# EAGLE board slide_sensor (EAGLE 6.4)

Size 102.54 x 80 mm. Coordinates in mm from the lower left corner, seen from the top.
Outline: 0,0 102.54,0 102.54,80 0,80 0,0
Copper layers (1*16): Top 0.035mm / dielectric 1.5mm / Bottom 0.035mm
Design rules "default": minimum track width 10mil, minimum drill 24mil, track to track 8mil, track to pad 8mil, pad to pad 8mil, via to via 8mil, smd to smd 8mil, copper to edge 40mil, drill to drill 8mil, minimum pad ring 10mil, minimum via ring 8mil, stop-mask expansion 4mil, vias tented up to drill 0mil, thermal gap 10mil

## Footprints (pad centres in the part's own frame; a part is rotated, then mirrored left to right if it is on the bottom)
LB10 = drill 0.813 long: 1 -11.43,-3.81; 2 -8.89,-3.81; 3 -6.35,-3.81; 4 -3.81,-3.81; 5 -1.27,-3.81; 6 1.27,-3.81; 7 3.81,-3.81; 8 6.35,-3.81; 9 8.89,-3.81; 10 11.43,-3.81; 11 11.43,3.81; 12 8.89,3.81; 13 6.35,3.81; 14 3.81,3.81; 15 1.27,3.81; 16 -1.27,3.81; 17 -3.81,3.81; 18 -6.35,3.81; 19 -8.89,3.81; 20 -11.43,3.81
DCJ0202 = drill 1 pad 2 long: 1 0,3.1; 2 4.8,0; 3 0,-3
0207/7 = drill 0.813 octagon: 1 -3.81,0; 2 3.81,0
MA07-1 = drill 1.016 long: 1 -7.62,0; 2 -5.08,0; 3 -2.54,0; 4 0,0; 5 2.54,0; 6 5.08,0; 7 7.62,0
MA03-1 = drill 1.016 long: 1 -2.54,0; 2 0,0; 3 2.54,0
SOFTPOT = drill 0.9 long: 1 -2.54,-2.54; GND -2.54,-7.62; OUT -2.54,-5.08 | hole 0.9: -2.54,-2.54; -2.54,-5.08; -2.54,-7.62

## Placement (x,y rotation side)
BAR1  [LB10]  50.8,13.97 0 top
BAR2  [LB10]  38.1,33.02 0 top
BAR3  [LB10]  63.5,33.02 0 top
BAR4  [LB10]  88.9,33.02 0 top
J1  DCJ0202  [DCJ0202]  9.53,36.83 270 top
R1  [0207/7]  83.82,50.8 0 top
R2  [0207/7]  73.66,48.26 0 top
R3  [0207/7]  35.56,50.8 0 top
R4  [0207/7]  86.36,45.72 0 top
R5  [0207/7]  25.4,48.26 0 top
R6  [0207/7]  45.72,45.72 0 top
R7  [0207/7]  60.96,50.8 0 top
SV1  [MA07-1]  17.78,36.83 90 top
SV2  [MA03-1]  6.35,49.53 90 top
U$1  HOTPOT100MMSOFTPOT100MM  [SOFTPOT]  5.08,20.32 0 top

## Library data of the parts
BAR1-BAR4 = led
J1 = con-jack; OC_FARNELL: unknown; OC_NEWARK: unknown
R1-R7 = rcl
SV1 SV2 = con-lstb; OC_FARNELL: unknown; OC_NEWARK: unknown
U$1 = plainlystated

## Nets
N$1: BAR1.5 BAR1.15 BAR2.9 BAR2.11 BAR3.3 BAR3.17 R1.1 SV1.4
N$2: BAR1.8 BAR1.14 BAR3.2 BAR3.6 BAR3.16 BAR3.20 R1.2
N$3: BAR1.7 BAR1.13 BAR2.5 BAR2.15 BAR3.7 BAR3.13 BAR4.1 BAR4.19 R3.1 SV1.5
N$4: BAR1.3 BAR1.17 BAR2.3 BAR2.17 R2.1 SV1.3
N$5: BAR1.6 BAR1.16 BAR2.6 BAR2.16 BAR3.10 BAR3.12 BAR4.6 BAR4.16 R2.2
N$6: BAR1.10 BAR1.12 BAR2.8 BAR2.14 R3.2
N$7: BAR1.9 BAR1.11 BAR3.1 BAR3.9 BAR3.11 BAR3.19 BAR4.3 BAR4.7 BAR4.13 BAR4.17 R4.1 SV1.6
N$8: BAR1.1 BAR1.19 R5.1 SV1.2
N$9: BAR1.4 BAR1.18 BAR2.10 BAR2.12 BAR3.8 BAR3.14 BAR4.4 BAR4.10 BAR4.12 BAR4.18 R5.2
N$10: BAR2.2 BAR2.20 R4.2
N$11: BAR2.1 BAR2.7 BAR2.13 BAR2.19 BAR3.5 BAR3.15 BAR4.5 BAR4.9 BAR4.11 BAR4.15 R6.1 SV1.7
N$12: R7.1 SV1.1
N$13: BAR1.2 BAR1.20 BAR2.4 BAR2.18 BAR3.4 BAR3.18 BAR4.2 BAR4.8 BAR4.14 BAR4.20 R7.2
N$14: R6.2
N$15: J1.1 SV2.3 U$1.1
N$16: SV2.2 U$1.OUT
N$17: J1.3 SV2.1 U$1.GND

## Tracks (layer width: path | path; a pad name or v marks a point on that pad's centre or on a via)
N$1  (7 unrouted)
N$2  (6 unrouted)
N$3  (9 unrouted)
N$4  (5 unrouted)
N$5  (8 unrouted)
N$6  (4 unrouted)
N$7  (11 unrouted)
N$8  (3 unrouted)
N$9  (10 unrouted)
N$10  (2 unrouted)
N$11  (11 unrouted)
N$12  (1 unrouted)
N$13  (10 unrouted)
N$15  (2 unrouted)
N$16  (1 unrouted)
N$17  (2 unrouted)